# Altium PCB heart.PcbDoc (part 4 of 8)
Units mil, origin at the board's own origin, x right, y up, seen from the top; angles counter-clockwise.
Board outline 5000 x 6000 mil, 2 copper layers (Top Layer, Bottom Layer); 76 components, 43 nets, 328 pads, 50 vias.
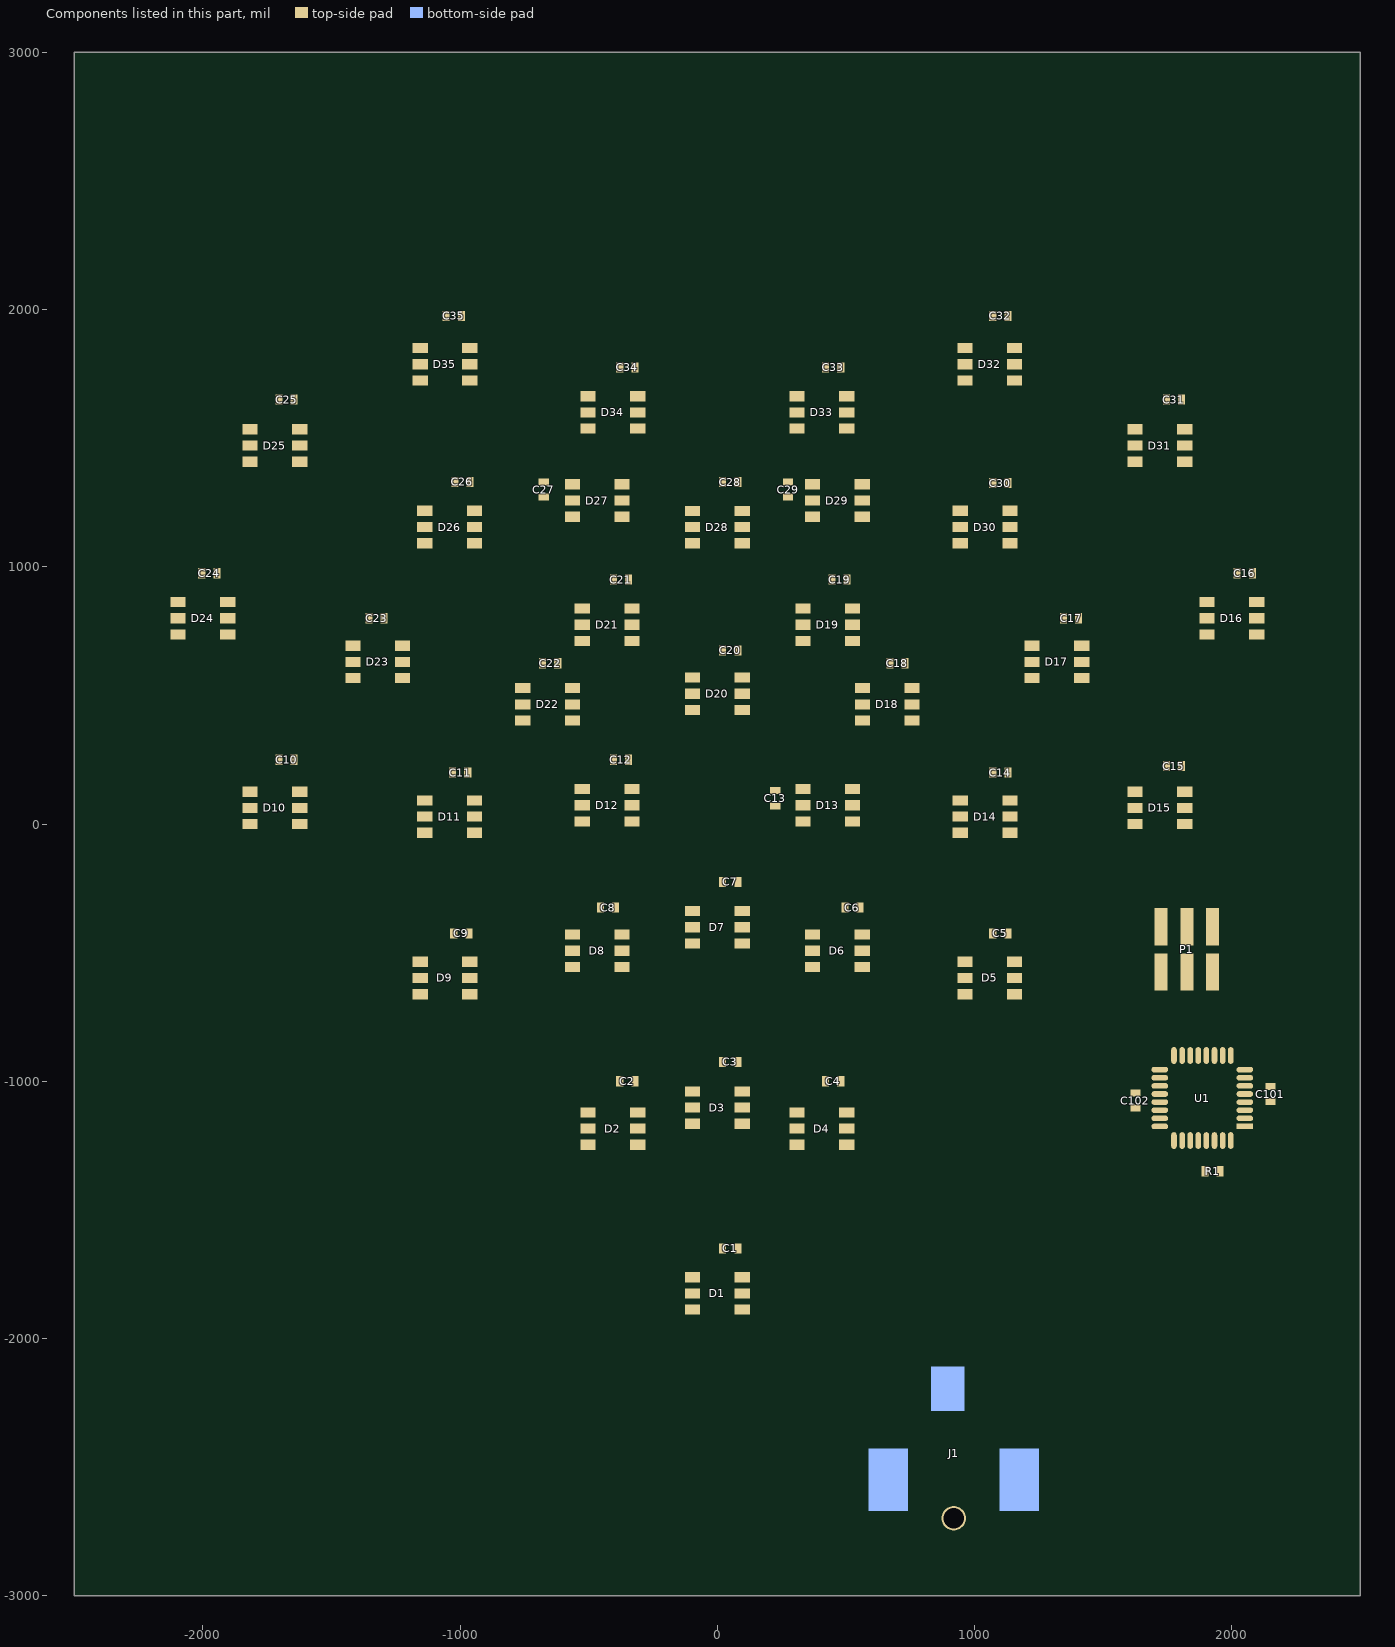
[diagram p4: the components of this part, seen from the top]

## Via types
v1: diameter 48, hole 20, Top Layer to Bottom Layer, 46 vias
v2: diameter 165, hole 150, Top Layer to Bottom Layer, 4 vias

## Nets (pads, with @x,y where several pads share a name; then routed paths per layer and width w, separated by ;. In a path a pad name is that pad's centre, name@x,y a point inside that pad or via, vN(x,y) a via of type N, cw(c..) or ccw(c..) an arc to the next point about the centre after c; other vN are vias at no path point) (continued)
copper on no net: (continued)
  Bottom Layer w2.65: -1898.12,-1480.56 -1855.64,-1480.56 ; -1898.12,-1477.91 -1852.98,-1477.91 ; -1898.12,-1419.5 -1892.81,-1419.5 ; -1898.12,-1416.84 -1892.81,-1416.84 ; -1898.12,-1414.19 -1895.46,-1414.19 ; -1898.12,-1260.2 -1884.84,-1260.2 ; -1895.46,-2221.32 -1852.98,-2221.32 ; -1895.46,-2157.6 -1882.19,-2157.6 ; -1895.46,-2154.94 -1879.53,-2154.94 ; -1895.46,-2104.49 -1871.57,-2104.49 ; -1895.46,-2101.84 -1852.98,-2101.84 ; -1895.46,-2072.63 -1775.99,-2072.63 ; -1895.46,-2048.74 -1847.67,-2048.74 ; -1895.46,-1833.68 -1850.33,-1833.68 ; -1895.46,-1785.89 -1868.91,-1785.89 ; -1895.46,-1722.17 -1040.54,-1722.17 ; -1895.46,-1589.42 -1744.13,-1589.42 ; -1895.46,-1475.25 -1852.98,-1475.25 ; -1895.46,-1390.29 -1834.4,-1390.29 ; -1895.46,-1262.85 -1884.84,-1262.85 ; -1892.81,-2152.28 -1879.53,-2152.28 ; -1892.81,-2149.63 -1879.53,-2149.63 ; -1892.81,-2109.8 -1876.88,-2109.8 ; -1892.81,-2107.15 -1874.22,-2107.15 ; -1892.81,-1836.34 -1847.67,-1836.34 ; -1892.81,-1719.52 -1037.89,-1719.52 ; -1892.81,-1592.07 -1744.13,-1592.07 ; -1892.81,-1472.6 -1850.33,-1472.6 ; -1892.81,-1268.16 -1882.19,-1268.16 ; -1892.81,-1265.51 -1882.19,-1265.51 ; -1890.15,-2146.97 -1876.88,-2146.97 ; -1890.15,-2144.32 -1876.88,-2144.32 ; -1890.15,-2141.66 -1876.88,-2141.66 ; -1890.15,-2139.01 -1876.88,-2139.01 ; -1890.15,-2120.42 -1876.88,-2120.42 ; -1890.15,-2117.77 -1876.88,-2117.77 ; -1890.15,-2115.11 -1876.88,-2115.11 ; -1890.15,-2112.46 -1876.88,-2112.46 ; -1890.15,-2075.29 -1775.99,-2075.29 ; -1890.15,-1838.99 -1845.02,-1838.99 ; -1890.15,-1788.55 -1868.91,-1788.55 ; -1890.15,-1716.86 -1035.23,-1716.86 ; -1890.15,-1714.21 -1029.92,-1714.21 ; -1890.15,-1594.73 -1746.78,-1594.73 ; -1890.15,-1493.84 -1860.95,-1493.84 ; -1890.15,-1469.94 -1850.33,-1469.94 ; -1890.15,-1392.95 -1834.4,-1392.95 ; -1890.15,-1273.47 -1879.53,-1273.47 ; -1890.15,-1270.82 -1879.53,-1270.82 ; -1887.5,-2223.97 -1845.02,-2223.97 ; -1887.5,-2136.35 -1874.22,-2136.35 ; -1887.5,-2133.7 -1874.22,-2133.7 ; -1887.5,-2131.04 -1874.22,-2131.04 ; -1887.5,-2128.39 -1874.22,-2128.39 ; -1887.5,-2125.73 -1874.22,-2125.73 ; -1887.5,-2123.08 -1874.22,-2123.08 ; -1887.5,-2077.94 -1778.64,-2077.94 ; -1887.5,-1841.65 -1842.36,-1841.65 ; -1887.5,-1791.2 -1866.26,-1791.2 ; -1887.5,-1711.55 -1021.96,-1711.55 ; -1887.5,-1597.38 -1746.78,-1597.38 ; -1887.5,-1467.29 -1850.33,-1467.29 ; -1887.5,-1395.6 -1834.4,-1395.6 ; -1884.84,-2080.6 -1778.64,-2080.6 ; -1884.84,-1844.3 -1839.71,-1844.3 ; -1884.84,-1793.86 -1863.6,-1793.86 ; -1884.84,-1708.9 -1016.65,-1708.9 ; -1884.84,-1602.69 -1749.44,-1602.69 ; -1884.84,-1600.04 -1746.78,-1600.04 ; -1884.84,-1464.63 -1847.67,-1464.63 ; -1884.84,-1461.98 -1847.67,-1461.98 ; -1884.84,-1398.26 -1834.4,-1398.26 ; -1882.19,-1849.61 -1831.74,-1849.61 ; -1882.19,-1846.96 -1834.4,-1846.96 ; -1882.19,-1706.24 -1006.03,-1706.24 ; -1882.19,-1703.59 -995.41,-1703.59 ; -1882.19,-1605.35 -1749.44,-1605.35 ; -1882.19,-1459.32 -1845.02,-1459.32 ; -1882.19,-1400.91 -1834.4,-1400.91 ; -1879.53,-2226.63 -1834.4,-2226.63 ; -1879.53,-1852.27 -1829.09,-1852.27 ; -1879.53,-1796.51 -1860.95,-1796.51 ; -1879.53,-1700.93 -982.13,-1700.93 ; -1879.53,-1610.66 -1749.44,-1610.66 ; -1879.53,-1608 -1749.44,-1608 ; -1879.53,-1496.49 -1860.95,-1496.49 ; -1879.53,-1456.67 -1845.02,-1456.67 ; -1879.53,-1403.57 -1834.4,-1403.57 ; -1876.88,-2229.28 -1823.78,-2229.28 ; -1876.88,-2091.22 -1868.91,-2091.22 ; -1876.88,-1854.92 -1826.43,-1854.92 ; -1876.88,-1799.17 -1860.95,-1799.17 ; -1876.88,-1698.28 -963.55,-1698.28 ; -1876.88,-1695.62 -942.31,-1695.62 ; -1876.88,-1692.97 -921.07,-1692.97 ; -1876.88,-1615.97 -1749.44,-1615.97 ; -1876.88,-1613.31 -1749.44,-1613.31 ; -1876.88,-1454.01 -1842.36,-1454.01 ; -1876.88,-1451.36 -1842.36,-1451.36 ; -1876.88,-1408.88 -1831.74,-1408.88 ; -1876.88,-1406.22 -1831.74,-1406.22 ; -1876.88,-1284.09 -1868.91,-1284.09 ; -1876.88,-1254.89 -1834.4,-1254.89 ; -1874.22,-1857.58 -1823.78,-1857.58 ; -1874.22,-1801.82 -1858.29,-1801.82 ; -1874.22,-1690.31 -902.48,-1690.31 ; -1874.22,-1687.66 -881.24,-1687.66 ; -1874.22,-1621.28 -1749.44,-1621.28 ; -1874.22,-1618.62 -1749.44,-1618.62 ; -1874.22,-1448.7 -1839.71,-1448.7 ; -1874.22,-1446.05 -1839.71,-1446.05 ; -1874.22,-1443.39 -1839.71,-1443.39 ; -1874.22,-1414.19 -1834.4,-1414.19 ; -1874.22,-1411.53 -1831.74,-1411.53 ; -1874.22,-1281.44 -1868.91,-1281.44 ; -1874.22,-1257.54 -1837.05,-1257.54 ; -1871.57,-2231.94 -1770.68,-2231.94 ; -1871.57,-1860.23 -1821.12,-1860.23 ; -1871.57,-1685 -1475.97,-1685 ; -1871.57,-1682.35 -1489.24,-1682.35 ; -1871.57,-1679.69 -1494.55,-1679.69 ; -1871.57,-1629.24 -1746.78,-1629.24 ; -1871.57,-1626.59 -1746.78,-1626.59 ; -1871.57,-1623.93 -1749.44,-1623.93 ; -1871.57,-1499.15 -1863.6,-1499.15 ; -1871.57,-1440.74 -1837.05,-1440.74 ; -1871.57,-1438.08 -1837.05,-1438.08 ; -1871.57,-1435.43 -1837.05,-1435.43 ; -1871.57,-1432.77 -1837.05,-1432.77 ; -1871.57,-1430.12 -1834.4,-1430.12 ; -1871.57,-1427.46 -1834.4,-1427.46 ; -1871.57,-1424.81 -1834.4,-1424.81 ; -1871.57,-1422.15 -1834.4,-1422.15 ; -1871.57,-1419.5 -1834.4,-1419.5 ; -1871.57,-1416.84 -1834.4,-1416.84 ; -1871.57,-1278.78 -1868.91,-1278.78 ; -1871.57,-1276.13 -1868.91,-1276.13 ; -1868.91,-2234.59 -1860.95,-2234.59 ; -1868.91,-1923.95 -1632.62,-1923.95 ; -1868.91,-1865.54 -1813.16,-1865.54 ; -1868.91,-1862.89 -1815.81,-1862.89 ; -1868.91,-1804.48 -1855.64,-1804.48 ; -1868.91,-1677.04 -1499.86,-1677.04 ; -1868.91,-1674.38 -1505.17,-1674.38 ; -1868.91,-1671.73 -1507.83,-1671.73 ; -1868.91,-1669.07 -1510.48,-1669.07 ; -1868.91,-1666.42 -1513.14,-1666.42 ; -1868.91,-1663.76 -1513.14,-1663.76 ; -1868.91,-1645.18 -1738.82,-1645.18 ; -1868.91,-1642.52 -1741.47,-1642.52 ; -1868.91,-1639.86 -1741.47,-1639.86 ; -1868.91,-1637.21 -1744.13,-1637.21 ; -1868.91,-1634.55 -1744.13,-1634.55 ; -1868.91,-1631.9 -1746.78,-1631.9 ; -1868.91,-1544.28 -1863.6,-1544.28 ; -1868.91,-1260.2 -1837.05,-1260.2 ; -1866.26,-2277.07 -1714.92,-2277.07 ; -1866.26,-2239.9 -1858.29,-2239.9 ; -1866.26,-2237.25 -1858.29,-2237.25 ; -1866.26,-2125.73 -1855.64,-2125.73 ; -1866.26,-2123.08 -1855.64,-2123.08 ; -1866.26,-2120.42 -1858.29,-2120.42 ; -1866.26,-2117.77 -1858.29,-2117.77 ; -1866.26,-2115.11 -1860.95,-2115.11 ; -1866.26,-2112.46 -1863.6,-2112.46 ; -1866.26,-2022.19 -1818.47,-2022.19 ; -1866.26,-1868.2 -1810.5,-1868.2 ; -1866.26,-1807.13 -1855.64,-1807.13 ; -1866.26,-1748.72 -1470.66,-1748.72 ; -1866.26,-1661.11 -1714.92,-1661.11 ; -1866.26,-1658.45 -1720.23,-1658.45 ; -1866.26,-1655.8 -1725.54,-1655.8 ; -1866.26,-1653.14 -1730.85,-1653.14 ; -1866.26,-1650.49 -1733.51,-1650.49 ; -1866.26,-1647.83 -1736.16,-1647.83 ; -1866.26,-1262.85 -1837.05,-1262.85 ; -1863.6,-2242.56 -1858.29,-2242.56 ; -1863.6,-1873.51 -1805.19,-1873.51 ; -1863.6,-1870.85 -1807.85,-1870.85 ; -1863.6,-1809.79 -1852.98,-1809.79 ; -1863.6,-1268.16 -1839.71,-1268.16 ; -1863.6,-1265.51 -1837.05,-1265.51 ; -1860.95,-2245.21 -1855.64,-2245.21 ; -1860.95,-2083.25 -1778.64,-2083.25 ; -1860.95,-1921.3 -1648.55,-1921.3 ; -1860.95,-1878.82 -1799.88,-1878.82 ; -1860.95,-1876.16 -1802.54,-1876.16 ; -1860.95,-1281.44 -1839.71,-1281.44 ; -1860.95,-1278.78 -1839.71,-1278.78 ; -1860.95,-1276.13 -1839.71,-1276.13 ; -1860.95,-1273.47 -1839.71,-1273.47 ; -1860.95,-1270.82 -1839.71,-1270.82 ; -1858.29,-2250.52 -1855.64,-2250.52 ; -1858.29,-2247.87 -1855.64,-2247.87 ; -1858.29,-2104.49 -1850.33,-2104.49 ; -1858.29,-1918.64 -1656.51,-1918.64 ; -1858.29,-1884.13 -1794.57,-1884.13 ; -1858.29,-1881.47 -1797.23,-1881.47 ; -1858.29,-1812.44 -1850.33,-1812.44 ; -1858.29,-1751.38 -1470.66,-1751.38 ; -1858.29,-1284.09 -1839.71,-1284.09 ; -1855.64,-2274.42 -1712.27,-2274.42 ; -1855.64,-2234.59 -1775.99,-2234.59 ; -1855.64,-2107.15 -1850.33,-2107.15 ; -1855.64,-2085.91 -1778.64,-2085.91 ; -1855.64,-1915.99 -1760.06,-1915.99 ; -1855.64,-1913.33 -1762.71,-1913.33 ; -1855.64,-1889.44 -1789.26,-1889.44 ; -1855.64,-1886.78 -1791.92,-1886.78 ; -1855.64,-1815.1 -1847.67,-1815.1 ; -1852.98,-2271.76 -1693.68,-2271.76 ; -1852.98,-2109.8 -1850.33,-2109.8 ; -1852.98,-2088.56 -1778.64,-2088.56 ; -1852.98,-2019.53 -1815.81,-2019.53 ; -1852.98,-1947.85 -1760.06,-1947.85 ; -1852.98,-1910.68 -1768.02,-1910.68 ; -1852.98,-1908.02 -1770.68,-1908.02 ; -1852.98,-1905.37 -1773.33,-1905.37 ; -1852.98,-1902.71 -1775.99,-1902.71 ; -1852.98,-1900.06 -1778.64,-1900.06 ; -1852.98,-1897.4 -1781.3,-1897.4 ; -1852.98,-1894.75 -1783.95,-1894.75 ; -1852.98,-1892.09 -1786.61,-1892.09 ; -1852.98,-1817.75 -1847.67,-1817.75 ; -1852.98,-1754.03 -1473.31,-1754.03 ; -1850.33,-2269.11 -1693.68,-2269.11 ; -1850.33,-2091.22 -1778.64,-2091.22 ; -1850.33,-2064.67 -1773.33,-2064.67 ; -1850.33,-1820.41 -1845.02,-1820.41 ; -1850.33,-1756.69 -1475.97,-1756.69 ; -1847.67,-2266.45 -1691.03,-2266.45 ; -1847.67,-2263.8 -1691.03,-2263.8 ; -1847.67,-2237.25 -1778.64,-2237.25 ; -1847.67,-2093.87 -1778.64,-2093.87 ; -1847.67,-2016.88 -1815.81,-2016.88 ; -1847.67,-1823.06 -1842.36,-1823.06 ; -1847.67,-1759.34 -1669.79,-1759.34 ; -1845.02,-2261.14 -1691.03,-2261.14 ; -1845.02,-2258.49 -1693.68,-2258.49 ; -1845.02,-2255.83 -1693.68,-2255.83 ; -1845.02,-2253.18 -1693.68,-2253.18 ; -1845.02,-2250.52 -1831.74,-2250.52 ; -1845.02,-2247.87 -1842.36,-2247.87 ; -1845.02,-2099.18 -1778.64,-2099.18 ; -1845.02,-2096.53 -1778.64,-2096.53 ; -1845.02,-2014.22 -1815.81,-2014.22 ; -1845.02,-1762 -1675.1,-1762 ; -1842.36,-2125.73 -1770.68,-2125.73 ; -1842.36,-2123.08 -1773.33,-2123.08 ; -1842.36,-2109.8 -1775.99,-2109.8 ; -1842.36,-2107.15 -1778.64,-2107.15 ; -1842.36,-2104.49 -1778.64,-2104.49 ; -1842.36,-2101.84 -1778.64,-2101.84 ; -1842.36,-1950.5 -1765.37,-1950.5 ; -1842.36,-1825.72 -1839.71,-1825.72 ; -1842.36,-1764.65 -1677.75,-1764.65 ; -1839.71,-2120.42 -1773.33,-2120.42 ; -1839.71,-2117.77 -1773.33,-2117.77 ; -1839.71,-2115.11 -1775.99,-2115.11 ; -1839.71,-2112.46 -1775.99,-2112.46 ; -1839.71,-2062.01 -1773.33,-2062.01 ; -1839.71,-2011.57 -1815.81,-2011.57 ; -1839.71,-1767.31 -1680.41,-1767.31 ; -1837.05,-2239.9 -1786.61,-2239.9 ; -1837.05,-2008.91 -1815.81,-2008.91 ; -1837.05,-2006.26 -1813.16,-2006.26 ; -1834.4,-2178.84 -1831.74,-2178.84 ; -1834.4,-2176.18 -1829.09,-2176.18 ; -1834.4,-2173.53 -1826.43,-2173.53 ; -1834.4,-2059.36 -1770.68,-2059.36 ; -1834.4,-2003.6 -1813.16,-2003.6 ; -1834.4,-1953.16 -1770.68,-1953.16 ; -1834.4,-1769.96 -1706.96,-1769.96 ; -1831.74,-2170.87 -1823.78,-2170.87 ; -1831.74,-2168.22 -1818.47,-2168.22 ; -1831.74,-2000.95 -1815.81,-2000.95 ; -1831.74,-1998.29 -1815.81,-1998.29 ; -1831.74,-1995.64 -1815.81,-1995.64 ; -1831.74,-1971.74 -1826.43,-1971.74 ; -1831.74,-1791.2 -1829.09,-1791.2 ; -1831.74,-1772.62 -1709.61,-1772.62 ; -1831.74,-1525.7 -1752.09,-1525.7 ; -1831.74,-1523.04 -1749.44,-1523.04 ; -1831.74,-1286.75 -1818.47,-1286.75 ; -1829.09,-2165.56 -1815.81,-2165.56 ; -1829.09,-2162.91 -1807.85,-2162.91 ; -1829.09,-2056.7 -1770.68,-2056.7 ; -1829.09,-1992.98 -1815.81,-1992.98 ; -1829.09,-1990.33 -1815.81,-1990.33 ; -1829.09,-1987.67 -1818.47,-1987.67 ; -1829.09,-1985.02 -1818.47,-1985.02 ; -1829.09,-1982.36 -1821.12,-1982.36 ; -1829.09,-1979.71 -1821.12,-1979.71 ; -1829.09,-1977.05 -1823.78,-1977.05 ; -1829.09,-1974.4 -1826.43,-1974.4 ; -1829.09,-1955.81 -1773.33,-1955.81 ; -1829.09,-1793.86 -1826.43,-1793.86 ; -1829.09,-1775.27 -1709.61,-1775.27 ; -1829.09,-1536.32 -1765.37,-1536.32 ; -1829.09,-1533.66 -1762.71,-1533.66 ; -1829.09,-1531.01 -1757.4,-1531.01 ; -1829.09,-1528.35 -1754.75,-1528.35 ; -1829.09,-1520.39 -1746.78,-1520.39 ; -1829.09,-1517.73 -1744.13,-1517.73 ; -1829.09,-1515.08 -1741.47,-1515.08 ; -1829.09,-1512.42 -1738.82,-1512.42 ; -1829.09,-1509.77 -1736.16,-1509.77 ; -1829.09,-1297.37 -1815.81,-1297.37 ; -1829.09,-1294.71 -1815.81,-1294.71 ; -1829.09,-1292.06 -1815.81,-1292.06 ; -1829.09,-1289.4 -1815.81,-1289.4 ; -1829.09,-1284.09 -1818.47,-1284.09 ; -1829.09,-1281.44 -1815.81,-1281.44 ; -1829.09,-1278.78 -1815.81,-1278.78 ; -1829.09,-1276.13 -1815.81,-1276.13 ; -1829.09,-1273.47 -1815.81,-1273.47 ; -1829.09,-1270.82 -1815.81,-1270.82 ; -1829.09,-1268.16 -1815.81,-1268.16 ; -1829.09,-1265.51 -1815.81,-1265.51 ; -1829.09,-1262.85 -1813.16,-1262.85 ; -1826.43,-2160.25 -1765.37,-2160.25 ; -1826.43,-2054.05 -1768.02,-2054.05 ; -1826.43,-1958.47 -1775.99,-1958.47 ; -1826.43,-1799.17 -1821.12,-1799.17 ; -1826.43,-1796.51 -1823.78,-1796.51 ; -1826.43,-1777.93 -1712.27,-1777.93 ; -1826.43,-1541.63 -1773.33,-1541.63 ; -1826.43,-1538.97 -1770.68,-1538.97 ; -1826.43,-1507.11 -1733.51,-1507.11 ; -1826.43,-1504.46 -1730.85,-1504.46 ; -1826.43,-1501.8 -1728.2,-1501.8 ; -1826.43,-1305.33 -1810.5,-1305.33 ; -1826.43,-1302.68 -1813.16,-1302.68 ; -1826.43,-1300.02 -1813.16,-1300.02 ; -1826.43,-1260.2 -1813.16,-1260.2 ; -1826.43,-1257.54 -1810.5,-1257.54 ; -1826.43,-1254.89 -1810.5,-1254.89 ; -1823.78,-2242.56 -1797.23,-2242.56 ; -1823.78,-2157.6 -1768.02,-2157.6 ; -1823.78,-2051.39 -1765.37,-2051.39 ; -1823.78,-1801.82 -1815.81,-1801.82 ; -1823.78,-1780.58 -1709.61,-1780.58 ; -1823.78,-1544.28 -1778.64,-1544.28 ; -1823.78,-1499.15 -1725.54,-1499.15 ; -1823.78,-1496.49 -1722.89,-1496.49 ; -1823.78,-1310.64 -1807.85,-1310.64 ; -1823.78,-1307.99 -1810.5,-1307.99 ; -1823.78,-1252.23 -1807.85,-1252.23 ; -1821.12,-2048.74 -1765.37,-2048.74 ; -1821.12,-1961.12 -1778.64,-1961.12 ; -1821.12,-1804.48 -1813.16,-1804.48 ; -1821.12,-1783.24 -1709.61,-1783.24 ; -1821.12,-1493.84 -1720.23,-1493.84 ; -1821.12,-1491.18 -1714.92,-1491.18 ; -1821.12,-1315.95 -1805.19,-1315.95 ; -1821.12,-1313.3 -1807.85,-1313.3 ; -1821.12,-1249.58 -1807.85,-1249.58 ; -1821.12,-1246.92 -1805.19,-1246.92 ; -1818.47,-2154.94 -1770.68,-2154.94 ; -1818.47,-2046.08 -1765.37,-2046.08 ; -1818.47,-1966.43 -1781.3,-1966.43 ; -1818.47,-1963.78 -1778.64,-1963.78 ; -1818.47,-1807.13 -1810.5,-1807.13 ; -1818.47,-1785.89 -1706.96,-1785.89 ; -1818.47,-1546.94 -1783.95,-1546.94 ; -1818.47,-1488.53 -1712.27,-1488.53 ; -1818.47,-1485.87 -1709.61,-1485.87 ; -1818.47,-1483.22 -1704.3,-1483.22 ; -1818.47,-1321.26 -1799.88,-1321.26 ; -1818.47,-1318.61 -1802.54,-1318.61 ; -1818.47,-1244.27 -1802.54,-1244.27 ; -1818.47,-1241.61 -1799.88,-1241.61 ; -1818.47,-1215.06 -1810.5,-1215.06 ; -1818.47,-1212.41 -1813.16,-1212.41 ; -1815.81,-2043.43 -1768.02,-2043.43 ; -1815.81,-1969.09 -1783.95,-1969.09 ; -1815.81,-1809.79 -1807.85,-1809.79 ; -1815.81,-1788.55 -1706.96,-1788.55 ; -1815.81,-1480.56 -1736.16,-1480.56 ; -1815.81,-1477.91 -1746.78,-1477.91 ; -1815.81,-1323.92 -1797.23,-1323.92 ; -1815.81,-1238.96 -1794.57,-1238.96 ; -1815.81,-1230.99 -1781.3,-1230.99 ; -1815.81,-1228.34 -1770.68,-1228.34 ; -1815.81,-1225.68 -1741.47,-1225.68 ; -1815.81,-1223.03 -1802.54,-1223.03 ; -1815.81,-1220.37 -1805.19,-1220.37 ; -1815.81,-1217.72 -1807.85,-1217.72 ; -1815.81,-1201.79 -1359.15,-1201.79 ; -1813.16,-2152.28 -1775.99,-2152.28 ; -1813.16,-2040.77 -1770.68,-2040.77 ; -1813.16,-1971.74 -1783.95,-1971.74 ; -1813.16,-1812.44 -1802.54,-1812.44 ; -1813.16,-1791.2 -1704.3,-1791.2 ; -1813.16,-1549.59 -1791.92,-1549.59 ; -1813.16,-1475.25 -1752.09,-1475.25 ; -1813.16,-1472.6 -1754.75,-1472.6 ; -1813.16,-1326.57 -1791.92,-1326.57 ; -1813.16,-1236.3 -1791.92,-1236.3 ; -1810.5,-2038.12 -1773.33,-2038.12 ; -1810.5,-2035.46 -1775.99,-2035.46 ; -1810.5,-1977.05 -1786.61,-1977.05 ; -1810.5,-1974.4 -1786.61,-1974.4 ; -1810.5,-1817.75 -1797.23,-1817.75 ; -1810.5,-1815.1 -1799.88,-1815.1 ; -1810.5,-1469.94 -1757.4,-1469.94 ; -1810.5,-1467.29 -1760.06,-1467.29 ; -1810.5,-1329.23 -1789.26,-1329.23 ; -1810.5,-1233.65 -1786.61,-1233.65 ; -1807.85,-2149.63 -1783.95,-2149.63 ; -1807.85,-2032.81 -1778.64,-2032.81 ; -1807.85,-2030.15 -1781.3,-2030.15 ; -1807.85,-1979.71 -1789.26,-1979.71 ; -1807.85,-1820.41 -1794.57,-1820.41 ; -1807.85,-1793.86 -1701.65,-1793.86 ; -1807.85,-1464.63 -1760.06,-1464.63 ; -1807.85,-1461.98 -1762.71,-1461.98 ; -1807.85,-1459.32 -1765.37,-1459.32 ; -1807.85,-1331.88 -1783.95,-1331.88 ; -1807.85,-1284.09 -1688.37,-1284.09 ; -1807.85,-1281.44 -1685.72,-1281.44 ; -1807.85,-1278.78 -1685.72,-1278.78 ; -1807.85,-1276.13 -1685.72,-1276.13 ; -1807.85,-1273.47 -1683.06,-1273.47 ; -1807.85,-1270.82 -1683.06,-1270.82 ; -1807.85,-1204.44 -1361.8,-1204.44 ; -1805.19,-2027.5 -1781.3,-2027.5 ; -1805.19,-2024.84 -1783.95,-2024.84 ; -1805.19,-2022.19 -1783.95,-2022.19 ; -1805.19,-1990.33 -1789.26,-1990.33 ; -1805.19,-1987.67 -1789.26,-1987.67 ; -1805.19,-1985.02 -1789.26,-1985.02 ; -1805.19,-1982.36 -1789.26,-1982.36 ; -1805.19,-1823.06 -1791.92,-1823.06 ; -1805.19,-1796.51 -1701.65,-1796.51 ; -1805.19,-1456.67 -1765.37,-1456.67 ; -1805.19,-1454.01 -1768.02,-1454.01 ; -1805.19,-1451.36 -1768.02,-1451.36 ; -1805.19,-1334.54 -1778.64,-1334.54 ; -1805.19,-1268.16 -1680.41,-1268.16 ; -1805.19,-1265.51 -1680.41,-1265.51 ; -1805.19,-1262.85 -1675.1,-1262.85 ; -1805.19,-1207.1 -1367.11,-1207.1 ; -1802.54,-2019.53 -1786.61,-2019.53 ; -1802.54,-2016.88 -1786.61,-2016.88 ; -1802.54,-2014.22 -1786.61,-2014.22 ; -1802.54,-2011.57 -1789.26,-2011.57 ; -1802.54,-2008.91 -1789.26,-2008.91 ; -1802.54,-2006.26 -1789.26,-2006.26 ; -1802.54,-2003.6 -1789.26,-2003.6 ; -1802.54,-2000.95 -1789.26,-2000.95 ; -1802.54,-1998.29 -1789.26,-1998.29 ; -1802.54,-1995.64 -1789.26,-1995.64 ; -1802.54,-1992.98 -1789.26,-1992.98 ; -1802.54,-1825.72 -1786.61,-1825.72 ; -1802.54,-1799.17 -1698.99,-1799.17 ; -1802.54,-1586.76 -1741.47,-1586.76 ; -1802.54,-1448.7 -1770.68,-1448.7 ; -1802.54,-1446.05 -1770.68,-1446.05 ; -1802.54,-1443.39 -1773.33,-1443.39 ; -1802.54,-1440.74 -1773.33,-1440.74 ; -1802.54,-1260.2 -1672.44,-1260.2 ; -1802.54,-1257.54 -1664.48,-1257.54 ; -1802.54,-1209.75 -1781.3,-1209.75 ; -1799.88,-1828.37 -1783.95,-1828.37 ; -1799.88,-1801.82 -1696.34,-1801.82 ; -1799.88,-1438.08 -1773.33,-1438.08 ; -1799.88,-1435.43 -1775.99,-1435.43 ; -1799.88,-1432.77 -1778.64,-1432.77 ; -1799.88,-1430.12 -1778.64,-1430.12 ; -1799.88,-1427.46 -1783.95,-1427.46 ; -1799.88,-1395.6 -1667.13,-1395.6 ; -1799.88,-1392.95 -1667.13,-1392.95 ; -1799.88,-1390.29 -1669.79,-1390.29 ; -1799.88,-1387.64 -1669.79,-1387.64 ; -1799.88,-1337.19 -1754.75,-1337.19 ; -1799.88,-1254.89 -1566.24,-1254.89 ; -1799.88,-1212.41 -1791.92,-1212.41 ; -1797.23,-2229.28 -1768.02,-2229.28 ; -1797.23,-1833.68 -1778.64,-1833.68 ; -1797.23,-1831.03 -1781.3,-1831.03 ; -1797.23,-1804.48 -1696.34,-1804.48 ; -1797.23,-1424.81 -1789.26,-1424.81 ; -1797.23,-1398.26 -1667.13,-1398.26 ; -1797.23,-1339.85 -1706.96,-1339.85 ; -1797.23,-1252.23 -1560.93,-1252.23 ; -1794.57,-1836.34 -1773.33,-1836.34 ; -1794.57,-1249.58 -1558.27,-1249.58 ; -1791.92,-1838.99 -1770.68,-1838.99 ; -1791.92,-1807.13 -1693.68,-1807.13 ; -1791.92,-1342.5 -1709.61,-1342.5 ; -1791.92,-1246.92 -1555.62,-1246.92 ; -1791.92,-1223.03 -1746.78,-1223.03 ; -1789.26,-2250.52 -1693.68,-2250.52 ; -1789.26,-1841.65 -1768.02,-1841.65 ; -1789.26,-1809.79 -1691.03,-1809.79 ; -1786.61,-2226.63 -1765.37,-2226.63 ; -1786.61,-2162.91 -1762.71,-2162.91 ; -1786.61,-1844.3 -1765.37,-1844.3 ; -1786.61,-1812.44 -1688.37,-1812.44 ; -1786.61,-1400.91 -1667.13,-1400.91 ; -1786.61,-1345.16 -1709.61,-1345.16 ; -1786.61,-1244.27 -1730.85,-1244.27 ; -1786.61,-1220.37 -1752.09,-1220.37 ; -1783.95,-1846.96 -1760.06,-1846.96 ; -1783.95,-1815.1 -1685.72,-1815.1 ; -1781.3,-2247.87 -1696.34,-2247.87 ; -1781.3,-2223.97 -1762.71,-2223.97 ; -1781.3,-2165.56 -1760.06,-2165.56 ; -1781.3,-1852.27 -1754.75,-1852.27 ; -1781.3,-1849.61 -1757.4,-1849.61 ; -1781.3,-1817.75 -1685.72,-1817.75 ; -1781.3,-1584.11 -1741.47,-1584.11 ; -1781.3,-1241.61 -1738.82,-1241.61 ; -1778.64,-2221.32 -1760.06,-2221.32 ; -1778.64,-1854.92 -1752.09,-1854.92 ; -1778.64,-1403.57 -1664.48,-1403.57 ; -1778.64,-1347.81 -1706.96,-1347.81 ; -1775.99,-2245.21 -1696.34,-2245.21 ; -1775.99,-2218.66 -1757.4,-2218.66 ; -1775.99,-2168.22 -1757.4,-2168.22 ; -1775.99,-1857.58 -1746.78,-1857.58 ; -1775.99,-1820.41 -1683.06,-1820.41 ; -1775.99,-1238.96 -1746.78,-1238.96 ; -1773.33,-2216.01 -1757.4,-2216.01 ; -1773.33,-2170.87 -1757.4,-2170.87 ; -1773.33,-1860.23 -1744.13,-1860.23 ; -1773.33,-1823.06 -1680.41,-1823.06 ; -1773.33,-1581.45 -1738.82,-1581.45 ; -1773.33,-1406.22 -1661.82,-1406.22 ; -1770.68,-2242.56 -1698.99,-2242.56 ; -1770.68,-2213.35 -1754.75,-2213.35 ; -1770.68,-2173.53 -1754.75,-2173.53 ; -1770.68,-1865.54 -1736.16,-1865.54 ; -1770.68,-1862.89 -1741.47,-1862.89 ; -1770.68,-1825.72 -1677.75,-1825.72 ; -1770.68,-1408.88 -1661.82,-1408.88 ; -1770.68,-1334.54 -1754.75,-1334.54 ; -1768.02,-2210.7 -1754.75,-2210.7 ; -1768.02,-2208.04 -1752.09,-2208.04 ; -1768.02,-2178.84 -1752.09,-2178.84 ; -1768.02,-2176.18 -1754.75,-2176.18 ; -1768.02,-1998.29 -1744.13,-1998.29 ; -1768.02,-1995.64 -1744.13,-1995.64 ; -1768.02,-1992.98 -1746.78,-1992.98 ; -1768.02,-1990.33 -1746.78,-1990.33 ; -1768.02,-1987.67 -1746.78,-1987.67 ; -1768.02,-1985.02 -1746.78,-1985.02 ; -1768.02,-1868.2 -1733.51,-1868.2 ; -1768.02,-1828.37 -1675.1,-1828.37 ; -1768.02,-1578.8 -1736.16,-1578.8 ; -1768.02,-1411.53 -1659.17,-1411.53 ; -1768.02,-1350.47 -1738.82,-1350.47 ; -1768.02,-1331.88 -1754.75,-1331.88 ; -1768.02,-1329.23 -1754.75,-1329.23 ; -1765.37,-2239.9 -1698.99,-2239.9 ; -1765.37,-2205.39 -1752.09,-2205.39 ; -1765.37,-2202.73 -1728.2,-2202.73 ; -1765.37,-2200.08 -1728.2,-2200.08 ; -1765.37,-2197.42 -1730.85,-2197.42 ; -1765.37,-2189.46 -1746.78,-2189.46 ; -1765.37,-2186.8 -1749.44,-2186.8 ; -1765.37,-2184.15 -1752.09,-2184.15 ; -1765.37,-2181.49 -1752.09,-2181.49 ; -1765.37,-2006.26 -1736.16,-2006.26 ; -1765.37,-2003.6 -1738.82,-2003.6 ; -1765.37,-2000.95 -1741.47,-2000.95 ; -1765.37,-1982.36 -1749.44,-1982.36 ; -1765.37,-1979.71 -1749.44,-1979.71 ; -1765.37,-1870.85 -1730.85,-1870.85 ; -1765.37,-1831.03 -1675.1,-1831.03 ; -1765.37,-1414.19 -1656.51,-1414.19 ; -1765.37,-1326.57 -1754.75,-1326.57 ; -1762.71,-2237.25 -1701.65,-2237.25 ; -1762.71,-2194.77 -1736.16,-2194.77 ; -1762.71,-2192.11 -1741.47,-2192.11 ; -1762.71,-2008.91 -1730.85,-2008.91 ; -1762.71,-1977.05 -1746.78,-1977.05 ; -1762.71,-1974.4 -1746.78,-1974.4 ; -1762.71,-1873.51 -1725.54,-1873.51 ; -1762.71,-1576.14 -1733.51,-1576.14 ; -1762.71,-1419.5 -1651.2,-1419.5 ; -1762.71,-1416.84 -1653.86,-1416.84 ; -1762.71,-1323.92 -1754.75,-1323.92 ; -1762.71,-1321.26 -1754.75,-1321.26 ; -1762.71,-1318.61 -1754.75,-1318.61 ; -1762.71,-1315.95 -1757.4,-1315.95 ; -1762.71,-1313.3 -1757.4,-1313.3 ; -1762.71,-1310.64 -1760.06,-1310.64 ; -1762.71,-1307.99 -1760.06,-1307.99 ; -1760.06,-2234.59 -1738.82,-2234.59 ; -1760.06,-2014.22 -1648.55,-2014.22 ; -1760.06,-2011.57 -1725.54,-2011.57 ; -1760.06,-1971.74 -1746.78,-1971.74 ; -1760.06,-1878.82 -1720.23,-1878.82 ; -1760.06,-1876.16 -1722.89,-1876.16 ; -1760.06,-1833.68 -1672.44,-1833.68 ; -1760.06,-1422.15 -1648.55,-1422.15 ; -1757.4,-2231.94 -1741.47,-2231.94 ; -1757.4,-2016.88 -1645.89,-2016.88 ; -1757.4,-1969.09 -1746.78,-1969.09 ; -1757.4,-1881.47 -1717.58,-1881.47 ; -1757.4,-1836.34 -1669.79,-1836.34 ; -1757.4,-1573.49 -1730.85,-1573.49 ; -1757.4,-1427.46 -1637.93,-1427.46 ; -1757.4,-1424.81 -1643.24,-1424.81 ; -1757.4,-1209.75 -1369.77,-1209.75 ; -1754.75,-2019.53 -1645.89,-2019.53 ; -1754.75,-1966.43 -1744.13,-1966.43 ; -1754.75,-1884.13 -1712.27,-1884.13 ; -1754.75,-1838.99 -1667.13,-1838.99 ; -1754.75,-1435.43 -1736.16,-1435.43 ; -1754.75,-1432.77 -1733.51,-1432.77 ; -1754.75,-1430.12 -1730.85,-1430.12 ; -1752.09,-1963.78 -1741.47,-1963.78 ; -1752.09,-1915.99 -1661.82,-1915.99 ; -1752.09,-1889.44 -1706.96,-1889.44 ; -1752.09,-1886.78 -1709.61,-1886.78 ; -1752.09,-1841.65 -1664.48,-1841.65 ; -1752.09,-1570.83 -1725.54,-1570.83 ; -1752.09,-1443.39 -1738.82,-1443.39 ; -1752.09,-1440.74 -1738.82,-1440.74 ; -1752.09,-1438.08 -1738.82,-1438.08 ; -1752.09,-1228.34 -1736.16,-1228.34 ; -1749.44,-2022.19 -1722.89,-2022.19 ; -1749.44,-1913.33 -1667.13,-1913.33 ; -1749.44,-1892.09 -1701.65,-1892.09 ; -1749.44,-1568.18 -1720.23,-1568.18 ; -1749.44,-1451.36 -1738.82,-1451.36 ; -1749.44,-1448.7 -1738.82,-1448.7 ; -1749.44,-1446.05 -1738.82,-1446.05 ; -1746.78,-2101.84 -1714.92,-2101.84 ; -1746.78,-2099.18 -1714.92,-2099.18 ; -1746.78,-2096.53 -1714.92,-2096.53 ; -1746.78,-2093.87 -1717.58,-2093.87 ; -1746.78,-2091.22 -1717.58,-2091.22 ; -1746.78,-2088.56 -1720.23,-2088.56 ; -1746.78,-2085.91 -1720.23,-2085.91 ; -1746.78,-2083.25 -1722.89,-2083.25 ; -1746.78,-2080.6 -1722.89,-2080.6 ; -1746.78,-2077.94 -1725.54,-2077.94 ; -1746.78,-2024.84 -1730.85,-2024.84 ; -1746.78,-1961.12 -1741.47,-1961.12 ; -1746.78,-1910.68 -1672.44,-1910.68 ; -1746.78,-1897.4 -1693.68,-1897.4 ; -1746.78,-1894.75 -1698.99,-1894.75 ; -1746.78,-1844.3 -1661.82,-1844.3 ; -1746.78,-1456.67 -1733.51,-1456.67 ; -1746.78,-1454.01 -1736.16,-1454.01 ; -1746.78,-1212.41 -1555.62,-1212.41 ; -1744.13,-2107.15 -1714.92,-2107.15 ; -1744.13,-2104.49 -1714.92,-2104.49 ; -1744.13,-2075.29 -1728.2,-2075.29 ; -1744.13,-2072.63 -1733.51,-2072.63 ; -1744.13,-2069.98 -1736.16,-2069.98 ; -1744.13,-1908.02 -1677.75,-1908.02 ; -1744.13,-1905.37 -1683.06,-1905.37 ; -1744.13,-1902.71 -1685.72,-1902.71 ; -1744.13,-1900.06 -1691.03,-1900.06 ; -1744.13,-1846.96 -1661.82,-1846.96 ; -1744.13,-1565.52 -1714.92,-1565.52 ; -1744.13,-1459.32 -1730.85,-1459.32 ; -1741.47,-2112.46 -1714.92,-2112.46 ; -1741.47,-2109.8 -1714.92,-2109.8 ; -1741.47,-2067.32 -1738.82,-2067.32 ; -1741.47,-2027.5 -1738.82,-2027.5 ; -1741.47,-1849.61 -1659.17,-1849.61 ; -1741.47,-1562.87 -1595.45,-1562.87 ; -1741.47,-1461.98 -1720.23,-1461.98 ; -1741.47,-1230.99 -1733.51,-1230.99 ; -1741.47,-1215.06 -1560.93,-1215.06 ; -1738.82,-2115.11 -1714.92,-2115.11 ; -1738.82,-1852.27 -1656.51,-1852.27 ; -1738.82,-1560.21 -1595.45,-1560.21 ; -1738.82,-1464.63 -1725.54,-1464.63 ; -1738.82,-1337.19 -1701.65,-1337.19 ; -1738.82,-1217.72 -1560.93,-1217.72 ; -1736.16,-2117.77 -1717.58,-2117.77 ; -1736.16,-1557.56 -1595.45,-1557.56 ; -1733.51,-2234.59 -1701.65,-2234.59 ; -1733.51,-2205.39 -1725.54,-2205.39 ; -1733.51,-2120.42 -1717.58,-2120.42 ; -1733.51,-1854.92 -1653.86,-1854.92 ; -1733.51,-1554.9 -1595.45,-1554.9 ; -1733.51,-1480.56 -1701.65,-1480.56 ; -1733.51,-1220.37 -1560.93,-1220.37 ; -1730.85,-2208.04 -1725.54,-2208.04 ; -1730.85,-2123.08 -1717.58,-2123.08 ; -1730.85,-1857.58 -1651.2,-1857.58 ; -1730.85,-1223.03 -1552.96,-1223.03 ; -1728.2,-2231.94 -1704.3,-2231.94 ; -1728.2,-2213.35 -1725.54,-2213.35 ; -1728.2,-2210.7 -1725.54,-2210.7 ; -1728.2,-1860.23 -1648.55,-1860.23 ; -1728.2,-1552.25 -1595.45,-1552.25 ; -1728.2,-1334.54 -1696.34,-1334.54 ; -1728.2,-1225.68 -1547.65,-1225.68 ; -1725.54,-2125.73 -1720.23,-2125.73 ; -1725.54,-1942.54 -1106.92,-1942.54 ; -1725.54,-1862.89 -1645.89,-1862.89 ; -1725.54,-1549.59 -1595.45,-1549.59 ; -1725.54,-1228.34 -1545,-1228.34 ; -1722.89,-1546.94 -1595.45,-1546.94 ; -1722.89,-1477.91 -1696.34,-1477.91 ; -1722.89,-1350.47 -1706.96,-1350.47 ; -1722.89,-1331.88 -1693.68,-1331.88 ; -1722.89,-1230.99 -1545,-1230.99 ; -1720.23,-1865.54 -1645.89,-1865.54 ; -1720.23,-1544.28 -1595.45,-1544.28 ; -1720.23,-1353.12 -1706.96,-1353.12 ; -1720.23,-1244.27 -1552.96,-1244.27 ; -1720.23,-1236.3 -1547.65,-1236.3 ; -1720.23,-1233.65 -1545,-1233.65 ; -1717.58,-1945.19 -1106.92,-1945.19 ; -1717.58,-1868.2 -1643.24,-1868.2 ; -1717.58,-1541.63 -1598.1,-1541.63 ; -1717.58,-1475.25 -1691.03,-1475.25 ; -1717.58,-1241.61 -1550.31,-1241.61 ; -1717.58,-1238.96 -1547.65,-1238.96 ; -1714.92,-1870.85 -1640.58,-1870.85 ; -1714.92,-1538.97 -1598.1,-1538.97 ; -1714.92,-1472.6 -1685.72,-1472.6 ; -1714.92,-1430.12 -1624.65,-1430.12 ; -1714.92,-1355.78 -1706.96,-1355.78 ; -1714.92,-1329.23 -1688.37,-1329.23 ; -1712.27,-1947.85 -1106.92,-1947.85 ; -1712.27,-1536.32 -1598.1,-1536.32 ; -1712.27,-1469.94 -1677.75,-1469.94 ; -1712.27,-1432.77 -1505.17,-1432.77 ; -1712.27,-1361.09 -1706.96,-1361.09 ; -1712.27,-1358.43 -1706.96,-1358.43 ; -1709.61,-2048.74 -1680.41,-2048.74 ; -1709.61,-1873.51 -1637.93,-1873.51 ; -1709.61,-1533.66 -1600.76,-1533.66 ; -1709.61,-1467.29 -1669.79,-1467.29 ; -1709.61,-1435.43 -1507.83,-1435.43 ; -1709.61,-1363.74 -1706.96,-1363.74 ; -1709.61,-1326.57 -1683.06,-1326.57 ; -1706.96,-2051.39 -1669.79,-2051.39 ; -1706.96,-2011.57 -1648.55,-2011.57 ; -1706.96,-1950.5 -1367.11,-1950.5 ; -1706.96,-1876.16 -1635.27,-1876.16 ; -1706.96,-1531.01 -1600.76,-1531.01 ; -1706.96,-1464.63 -1505.17,-1464.63 ; -1706.96,-1461.98 -1507.83,-1461.98 ; -1706.96,-1459.32 -1510.48,-1459.32 ; -1706.96,-1446.05 -1513.14,-1446.05 ; -1706.96,-1443.39 -1513.14,-1443.39 ; -1706.96,-1440.74 -1513.14,-1440.74 ; -1706.96,-1438.08 -1510.48,-1438.08 ; -1704.3,-1878.82 -1635.27,-1878.82 ; -1704.3,-1528.35 -1603.41,-1528.35 ; -1704.3,-1456.67 -1513.14,-1456.67 ; -1704.3,-1454.01 -1513.14,-1454.01 ; -1704.3,-1451.36 -1513.14,-1451.36 ; -1704.3,-1448.7 -1513.14,-1448.7 ; -1704.3,-1323.92 -1677.75,-1323.92 ; -1701.65,-2054.05 -1661.82,-2054.05 ; -1701.65,-2008.91 -1648.55,-2008.91 ; -1701.65,-1953.16 -1372.42,-1953.16 ; -1701.65,-1525.7 -1603.41,-1525.7 ; -1701.65,-1321.26 -1672.44,-1321.26 ; -1698.99,-2216.01 -1685.72,-2216.01 ; -1698.99,-2213.35 -1685.72,-2213.35 ; -1698.99,-2210.7 -1685.72,-2210.7 ; -1698.99,-2208.04 -1685.72,-2208.04 ; -1698.99,-2205.39 -1685.72,-2205.39 ; -1698.99,-2202.73 -1685.72,-2202.73 ; -1698.99,-2200.08 -1683.06,-2200.08 ; -1698.99,-2056.7 -1651.2,-2056.7 ; -1698.99,-1955.81 -1377.73,-1955.81 ; -1698.99,-1881.47 -1632.62,-1881.47 ; -1698.99,-1769.96 -1680.41,-1769.96 ; -1698.99,-1523.04 -1606.07,-1523.04 ; -1696.34,-2226.63 -1683.06,-2226.63 ; -1696.34,-2223.97 -1683.06,-2223.97 ; -1696.34,-2221.32 -1683.06,-2221.32 ; -1696.34,-2218.66 -1683.06,-2218.66 ; -1696.34,-2197.42 -1683.06,-2197.42 ; -1696.34,-2194.77 -1683.06,-2194.77 ; -1696.34,-2192.11 -1683.06,-2192.11 ; -1696.34,-2189.46 -1680.41,-2189.46 ; -1696.34,-2059.36 -1643.24,-2059.36 ; -1696.34,-2006.26 -1648.55,-2006.26 ; -1696.34,-1884.13 -1629.96,-1884.13 ; -1696.34,-1520.39 -1608.72,-1520.39 ; -1696.34,-1318.61 -1667.13,-1318.61 ; -1693.68,-2234.59 -1677.75,-2234.59 ; -1693.68,-2231.94 -1680.41,-2231.94 ; -1693.68,-2229.28 -1680.41,-2229.28 ; -1693.68,-2186.8 -1680.41,-2186.8 ; -1693.68,-2184.15 -1677.75,-2184.15 ; -1693.68,-2181.49 -1677.75,-2181.49 ; -1693.68,-2062.01 -1635.27,-2062.01 ; -1693.68,-2003.6 -1648.55,-2003.6 ; -1693.68,-1958.47 -1584.82,-1958.47 ; -1693.68,-1772.62 -1683.06,-1772.62 ; -1693.68,-1517.73 -1611.38,-1517.73 ; -1691.03,-2239.9 -1675.1,-2239.9 ; -1691.03,-2237.25 -1675.1,-2237.25 ; -1691.03,-2178.84 -1675.1,-2178.84 ; -1691.03,-2067.32 -1619.34,-2067.32 ; -1691.03,-2064.67 -1627.31,-2064.67 ; -1691.03,-2000.95 -1648.55,-2000.95 ; -1691.03,-1998.29 -1645.89,-1998.29 ; -1691.03,-1963.78 -1608.72,-1963.78 ; -1691.03,-1961.12 -1600.76,-1961.12 ; -1691.03,-1886.78 -1627.31,-1886.78 ; -1691.03,-1775.27 -1683.06,-1775.27 ; -1691.03,-1315.95 -1661.82,-1315.95 ; -1688.37,-2242.56 -1672.44,-2242.56 ; -1688.37,-2176.18 -1675.1,-2176.18 ; -1688.37,-2173.53 -1672.44,-2173.53 ; -1688.37,-2069.98 -1611.38,-2069.98 ; -1688.37,-1995.64 -1645.89,-1995.64 ; -1688.37,-1966.43 -1616.69,-1966.43 ; -1688.37,-1889.44 -1627.31,-1889.44 ; -1688.37,-1777.93 -1683.06,-1777.93 ; -1688.37,-1515.08 -1614.03,-1515.08 ; -1685.72,-2277.07 -1680.41,-2277.07 ; -1685.72,-2274.42 -1677.75,-2274.42 ; -1685.72,-2247.87 -1667.13,-2247.87 ; -1685.72,-2245.21 -1669.79,-2245.21 ; -1685.72,-2170.87 -1669.79,-2170.87 ; -1685.72,-2168.22 -1667.13,-2168.22 ; -1685.72,-2075.29 -1523.76,-2075.29 ; -1685.72,-2072.63 -1595.45,-2072.63 ; -1685.72,-1992.98 -1645.89,-1992.98 ; -1685.72,-1990.33 -1643.24,-1990.33 ; -1685.72,-1987.67 -1643.24,-1987.67 ; -1685.72,-1985.02 -1640.58,-1985.02 ; -1685.72,-1982.36 -1640.58,-1982.36 ; -1685.72,-1979.71 -1637.93,-1979.71 ; -1685.72,-1977.05 -1635.27,-1977.05 ; -1685.72,-1974.4 -1632.62,-1974.4 ; -1685.72,-1971.74 -1627.31,-1971.74 ; -1685.72,-1969.09 -1622,-1969.09 ; -1685.72,-1565.52 -1595.45,-1565.52 ; -1685.72,-1512.42 -1616.69,-1512.42 ; -1685.72,-1313.3 -1656.51,-1313.3 ; -1683.06,-2287.69 -1247.64,-2287.69 ; -1683.06,-2271.76 -1675.1,-2271.76 ; -1683.06,-2269.11 -1672.44,-2269.11 ; -1683.06,-2266.45 -1669.79,-2266.45 ; -1683.06,-2263.8 -1608.72,-2263.8 ; -1683.06,-2261.14 -1637.93,-2261.14 ; -1683.06,-2258.49 -1648.55,-2258.49 ; -1683.06,-2250.52 -1664.48,-2250.52 ; -1683.06,-2165.56 -1664.48,-2165.56 ; -1683.06,-2080.6 -1529.07,-2080.6 ; -1683.06,-2077.94 -1526.41,-2077.94 ; -1683.06,-2022.19 -1645.89,-2022.19 ; -1683.06,-1892.09 -1624.65,-1892.09 ; -1683.06,-1509.77 -1619.34,-1509.77 ; -1680.41,-2253.18 -1659.17,-2253.18 ; -1680.41,-2162.91 -1661.82,-2162.91 ; -1680.41,-2088.56 -1534.38,-2088.56 ; -1680.41,-2085.91 -1531.72,-2085.91 ; -1680.41,-2083.25 -1531.72,-2083.25 ; -1680.41,-1894.75 -1622,-1894.75 ; -1680.41,-1310.64 -1648.55,-1310.64 ; -1677.75,-2255.83 -1653.86,-2255.83 ; -1677.75,-2160.25 -1656.51,-2160.25 ; -1677.75,-2125.73 -1587.48,-2125.73 ; -1677.75,-2099.18 -1537.03,-2099.18 ; -1677.75,-2096.53 -1537.03,-2096.53 ; -1677.75,-2093.87 -1534.38,-2093.87 ; -1677.75,-2091.22 -1534.38,-2091.22 ; -1677.75,-1568.18 -1595.45,-1568.18 ; -1677.75,-1507.11 -1622,-1507.11 ; -1677.75,-1297.37 -1659.17,-1297.37 ; -1677.75,-1294.71 -1661.82,-1294.71 ; -1677.75,-1292.06 -1664.48,-1292.06 ; -1677.75,-1289.4 -1664.48,-1289.4 ; -1677.75,-1286.75 -1667.13,-1286.75 ; -1677.75,-1284.09 -1669.79,-1284.09 ; -1677.75,-1281.44 -1669.79,-1281.44 ; -1677.75,-1278.78 -1669.79,-1278.78 ; -1675.1,-2285.04 -1252.95,-2285.04 ; -1675.1,-2157.6 -1651.2,-2157.6 ; -1675.1,-2123.08 -1587.48,-2123.08 ; -1675.1,-2120.42 -1590.14,-2120.42 ; -1675.1,-2117.77 -1592.79,-2117.77 ; -1675.1,-2115.11 -1595.45,-2115.11 ; -1675.1,-2112.46 -1598.1,-2112.46 ; -1675.1,-2109.8 -1603.41,-2109.8 ; -1675.1,-2107.15 -1606.07,-2107.15 ; -1675.1,-2104.49 -1537.03,-2104.49 ; -1675.1,-2101.84 -1537.03,-2101.84 ; -1675.1,-1897.4 -1622,-1897.4 ; -1675.1,-1307.99 -1637.93,-1307.99 ; -1675.1,-1305.33 -1584.82,-1305.33 ; -1675.1,-1302.68 -1590.14,-1302.68 ; -1675.1,-1300.02 -1595.45,-1300.02 ; -1675.1,-1276.13 -1669.79,-1276.13 ; -1672.44,-2282.38 -1255.6,-2282.38 ; -1672.44,-2154.94 -1645.89,-2154.94 ; -1672.44,-1900.06 -1619.34,-1900.06 ; -1672.44,-1783.24 -1635.27,-1783.24 ; -1672.44,-1780.58 -1640.58,-1780.58 ; -1672.44,-1777.93 -1643.24,-1777.93 ; -1672.44,-1775.27 -1648.55,-1775.27 ; -1672.44,-1570.83 -1595.45,-1570.83 ; -1672.44,-1504.46 -1627.31,-1504.46 ; -1672.44,-1273.47 -1669.79,-1273.47 ; -1672.44,-1270.82 -1669.79,-1270.82 ; -1669.79,-2279.73 -1648.55,-2279.73 ; -1669.79,-2231.94 -1531.72,-2231.94 ; -1669.79,-2024.84 -1643.24,-2024.84 ; -1669.79,-1788.55 -1627.31,-1788.55 ; -1669.79,-1785.89 -1632.62,-1785.89 ; -1669.79,-1772.62 -1653.86,-1772.62 ; -1669.79,-1573.49 -1595.45,-1573.49 ; -1667.13,-2277.07 -1659.17,-2277.07 ; -1667.13,-2234.59 -1433.49,-2234.59 ; -1667.13,-2152.28 -1622,-2152.28 ; -1667.13,-1902.71 -1619.34,-1902.71 ; -1667.13,-1793.86 -1622,-1793.86 ; -1667.13,-1791.2 -1624.65,-1791.2 ; -1667.13,-1576.14 -1595.45,-1576.14 ; -1667.13,-1501.8 -1635.27,-1501.8 ; -1664.48,-2237.25 -1428.18,-2237.25 ; -1664.48,-2149.63 -1574.2,-2149.63 ; -1664.48,-1799.17 -1614.03,-1799.17 ; -1664.48,-1796.51 -1619.34,-1796.51 ; -1664.48,-1769.96 -1661.82,-1769.96 ; -1664.48,-1578.8 -1595.45,-1578.8 ; -1661.82,-2266.45 -1614.03,-2266.45 ; -1661.82,-2239.9 -1425.52,-2239.9 ; -1661.82,-2146.97 -1576.86,-2146.97 ; -1661.82,-2027.5 -1643.24,-2027.5 ; -1661.82,-1801.82 -1611.38,-1801.82 ; -1661.82,-1581.45 -1598.1,-1581.45 ; -1661.82,-1278.78 -1627.31,-1278.78 ; -1661.82,-1276.13 -1622,-1276.13 ; -1661.82,-1273.47 -1616.69,-1273.47 ; -1659.17,-2242.56 -1422.87,-2242.56 ; -1659.17,-1905.37 -1616.69,-1905.37 ; -1659.17,-1804.48 -1608.72,-1804.48 ; -1659.17,-1584.11 -1598.1,-1584.11 ; -1659.17,-1395.6 -1643.24,-1395.6 ; -1659.17,-1392.95 -1645.89,-1392.95 ; -1659.17,-1390.29 -1645.89,-1390.29 ; -1659.17,-1387.64 -1648.55,-1387.64 ; -1659.17,-1384.98 -1648.55,-1384.98 ; -1659.17,-1382.33 -1648.55,-1382.33 ; -1659.17,-1379.67 -1648.55,-1379.67 ; -1659.17,-1377.02 -1645.89,-1377.02 ; -1659.17,-1281.44 -1635.27,-1281.44 ; -1659.17,-1270.82 -1608.72,-1270.82 ; -1656.51,-2245.21 -1598.1,-2245.21 ; -1656.51,-1807.13 -1606.07,-1807.13 ; -1656.51,-1639.86 -1653.86,-1639.86 ; -1656.51,-1637.21 -1645.89,-1637.21 ; -1656.51,-1589.42 -1600.76,-1589.42 ; -1656.51,-1586.76 -1598.1,-1586.76 ; -1656.51,-1400.91 -1640.58,-1400.91 ; -1656.51,-1398.26 -1643.24,-1398.26 ; -1656.51,-1374.36 -1645.89,-1374.36 ; -1656.51,-1371.71 -1643.24,-1371.71 ; -1656.51,-1284.09 -1643.24,-1284.09 ; -1653.86,-2269.11 -1619.34,-2269.11 ; -1653.86,-2144.32 -1576.86,-2144.32 ; -1653.86,-2030.15 -1640.58,-2030.15 ; -1653.86,-1908.02 -1616.69,-1908.02 ; -1653.86,-1812.44 -1600.76,-1812.44 ; -1653.86,-1809.79 -1603.41,-1809.79 ; -1653.86,-1661.11 -1515.79,-1661.11 ; -1653.86,-1634.55 -1640.58,-1634.55 ; -1653.86,-1631.9 -1635.27,-1631.9 ; -1653.86,-1594.73 -1600.76,-1594.73 ; -1653.86,-1592.07 -1600.76,-1592.07 ; -1653.86,-1499.15 -1648.55,-1499.15 ; -1653.86,-1403.57 -1635.27,-1403.57 ; -1653.86,-1369.05 -1640.58,-1369.05 ; -1653.86,-1366.4 -1637.93,-1366.4 ; -1653.86,-1268.16 -1600.76,-1268.16 ; -1651.2,-2247.87 -1606.07,-2247.87 ; -1651.2,-1815.1 -1598.1,-1815.1 ; -1651.2,-1629.24 -1632.62,-1629.24 ; -1651.2,-1626.59 -1627.31,-1626.59 ; -1651.2,-1623.93 -1624.65,-1623.93 ; -1651.2,-1621.28 -1622,-1621.28 ; -1651.2,-1618.62 -1619.34,-1618.62 ; -1651.2,-1608 -1608.72,-1608 ; -1651.2,-1605.35 -1608.72,-1605.35 ; -1651.2,-1602.69 -1606.07,-1602.69 ; -1651.2,-1600.04 -1603.41,-1600.04 ; -1651.2,-1597.38 -1603.41,-1597.38 ; -1651.2,-1406.22 -1629.96,-1406.22 ; -1651.2,-1363.74 -1635.27,-1363.74 ; -1651.2,-1297.37 -1598.1,-1297.37 ; -1651.2,-1260.2 -1579.51,-1260.2 ; -1651.2,-1257.54 -1574.2,-1257.54 ; -1648.55,-2141.66 -1576.86,-2141.66 ; -1648.55,-1817.75 -1595.45,-1817.75 ; -1648.55,-1615.97 -1616.69,-1615.97 ; -1648.55,-1613.31 -1614.03,-1613.31 ; -1648.55,-1610.66 -1611.38,-1610.66 ; -1648.55,-1408.88 -1579.51,-1408.88 ; -1648.55,-1265.51 -1595.45,-1265.51 ; -1648.55,-1262.85 -1587.48,-1262.85 ; -1645.89,-2032.81 -1640.58,-2032.81 ; -1645.89,-1910.68 -1619.34,-1910.68 ; -1645.89,-1820.41 -1592.79,-1820.41 ; -1645.89,-1411.53 -1582.17,-1411.53 ; -1645.89,-1361.09 -1614.03,-1361.09 ; -1643.24,-2250.52 -1614.03,-2250.52 ; -1643.24,-1823.06 -1590.14,-1823.06 ; -1643.24,-1658.45 -1518.45,-1658.45 ; -1643.24,-1414.19 -1587.48,-1414.19 ; -1643.24,-1358.43 -1619.34,-1358.43 ; -1640.58,-2035.46 -1637.93,-2035.46 ; -1640.58,-1825.72 -1584.82,-1825.72 ; -1640.58,-1759.34 -1475.97,-1759.34 ; -1640.58,-1294.71 -1603.41,-1294.71 ; -1637.93,-2154.94 -1622,-2154.94 ; -1637.93,-2139.01 -1606.07,-2139.01 ; -1637.93,-1828.37 -1582.17,-1828.37 ; -1637.93,-1416.84 -1592.79,-1416.84 ; -1637.93,-1390.29 -1592.79,-1390.29 ; -1637.93,-1387.64 -1590.14,-1387.64 ; -1635.27,-2160.25 -1622,-2160.25 ; -1635.27,-2157.6 -1622,-2157.6 ; -1635.27,-1913.33 -1624.65,-1913.33 ; -1635.27,-1831.03 -1579.51,-1831.03 ; -1635.27,-1655.8 -1518.45,-1655.8 ; -1635.27,-1467.29 -1502.52,-1467.29 ; -1635.27,-1392.95 -1595.45,-1392.95 ; -1635.27,-1355.78 -1627.31,-1355.78 ; -1635.27,-1292.06 -1603.41,-1292.06 ; -1632.62,-2165.56 -1622,-2165.56 ; -1632.62,-2162.91 -1622,-2162.91 ; -1632.62,-1833.68 -1576.86,-1833.68 ; -1632.62,-1762 -1475.97,-1762 ; -1632.62,-1419.5 -1600.76,-1419.5 ; -1632.62,-1395.6 -1600.76,-1395.6 ; -1629.96,-2178.84 -1627.31,-2178.84 ; -1629.96,-2176.18 -1624.65,-2176.18 ; -1629.96,-2173.53 -1624.65,-2173.53 ; -1629.96,-2170.87 -1622,-2170.87 ; -1629.96,-2168.22 -1622,-2168.22 ; -1629.96,-1836.34 -1574.2,-1836.34 ; -1629.96,-1289.4 -1595.45,-1289.4 ; -1627.31,-2279.73 -1260.91,-2279.73 ; -1627.31,-1838.99 -1571.55,-1838.99 ; -1627.31,-1653.14 -1518.45,-1653.14 ; -1624.65,-1841.65 -1568.89,-1841.65 ; -1624.65,-1764.65 -1475.97,-1764.65 ; -1624.65,-1469.94 -1499.86,-1469.94 ; -1624.65,-1398.26 -1608.72,-1398.26 ; -1624.65,-1286.75 -1587.48,-1286.75 ; -1622,-1844.3 -1566.24,-1844.3 ; -1622,-1650.49 -1521.1,-1650.49 ; -1619.34,-2261.14 -1606.07,-2261.14 ; -1619.34,-1846.96 -1563.58,-1846.96 ; -1619.34,-1767.31 -1475.97,-1767.31 ; -1619.34,-1647.83 -1521.1,-1647.83 ; -1619.34,-1472.6 -1494.55,-1472.6 ; -1619.34,-1284.09 -1579.51,-1284.09 ; -1616.69,-2277.07 -1422.87,-2277.07 ; -1616.69,-1849.61 -1563.58,-1849.61 ; -1614.03,-1852.27 -1560.93,-1852.27 ; -1614.03,-1769.96 -1475.97,-1769.96 ; -1614.03,-1645.18 -1521.1,-1645.18 ; -1614.03,-1475.25 -1436.14,-1475.25 ; -1611.38,-2274.42 -1428.18,-2274.42 ; -1611.38,-1868.2 -1608.72,-1868.2 ; -1611.38,-1854.92 -1558.27,-1854.92 ; -1611.38,-1307.99 -1582.17,-1307.99 ; -1611.38,-1281.44 -1571.55,-1281.44 ; -1608.72,-2258.49 -1603.41,-2258.49 ; -1608.72,-1923.95 -1398.97,-1923.95 ; -1608.72,-1873.51 -1603.41,-1873.51 ; -1608.72,-1870.85 -1606.07,-1870.85 ; -1608.72,-1772.62 -1475.97,-1772.62 ; -1608.72,-1642.52 -1521.1,-1642.52 ; -1608.72,-1477.91 -1436.14,-1477.91 ; -1606.07,-2271.76 -1428.18,-2271.76 ; -1606.07,-2152.28 -1568.89,-2152.28 ; -1606.07,-1878.82 -1598.1,-1878.82 ; -1606.07,-1876.16 -1600.76,-1876.16 ; -1606.07,-1857.58 -1555.62,-1857.58 ; -1606.07,-1639.86 -1523.76,-1639.86 ; -1606.07,-1430.12 -1475.97,-1430.12 ; -1603.41,-1921.3 -1412.25,-1921.3 ; -1603.41,-1884.13 -1590.14,-1884.13 ; -1603.41,-1881.47 -1592.79,-1881.47 ; -1603.41,-1860.23 -1552.96,-1860.23 ; -1603.41,-1775.27 -1475.97,-1775.27 ; -1603.41,-1637.21 -1523.76,-1637.21 ; -1603.41,-1480.56 -1433.49,-1480.56 ; -1603.41,-1406.22 -1576.86,-1406.22 ; -1603.41,-1310.64 -1579.51,-1310.64 ; -1603.41,-1278.78 -1566.24,-1278.78 ; -1600.76,-2269.11 -1428.18,-2269.11 ; -1600.76,-1918.64 -1420.21,-1918.64 ; -1600.76,-1889.44 -1584.82,-1889.44 ; -1600.76,-1886.78 -1587.48,-1886.78 ; -1600.76,-1862.89 -1550.31,-1862.89 ; -1600.76,-1634.55 -1523.76,-1634.55 ; -1600.76,-1483.22 -1433.49,-1483.22 ; -1598.1,-2266.45 -1422.87,-2266.45 ; -1598.1,-1915.99 -1542.34,-1915.99 ; -1598.1,-1913.33 -1550.31,-1913.33 ; -1598.1,-1897.4 -1574.2,-1897.4 ; -1598.1,-1894.75 -1576.86,-1894.75 ; -1598.1,-1892.09 -1582.17,-1892.09 ; -1598.1,-1865.54 -1547.65,-1865.54 ; -1598.1,-1777.93 -1473.31,-1777.93 ; -1598.1,-1631.9 -1523.76,-1631.9 ; -1598.1,-1485.87 -1436.14,-1485.87 ; -1598.1,-1313.3 -1574.2,-1313.3 ; -1598.1,-1276.13 -1558.27,-1276.13 ; -1595.45,-2263.8 -1414.9,-2263.8 ; -1595.45,-2154.94 -1566.24,-2154.94 ; -1595.45,-2048.74 -1552.96,-2048.74 ; -1595.45,-1910.68 -1555.62,-1910.68 ; -1595.45,-1908.02 -1558.27,-1908.02 ; -1595.45,-1905.37 -1563.58,-1905.37 ; -1595.45,-1902.71 -1566.24,-1902.71 ; -1595.45,-1900.06 -1571.55,-1900.06 ; -1595.45,-1868.2 -1545,-1868.2 ; -1595.45,-1780.58 -1473.31,-1780.58 ; -1595.45,-1488.53 -1441.45,-1488.53 ; -1595.45,-1427.46 -1478.62,-1427.46 ; -1595.45,-1403.57 -1574.2,-1403.57 ; -1592.79,-2261.14 -1412.25,-2261.14 ; -1592.79,-2051.39 -1560.93,-2051.39 ; -1592.79,-1870.85 -1545,-1870.85 ; -1592.79,-1629.24 -1523.76,-1629.24 ; -1592.79,-1626.59 -1521.1,-1626.59 ; -1592.79,-1491.18 -1444.11,-1491.18 ; -1592.79,-1315.95 -1574.2,-1315.95 ; -1590.14,-2258.49 -1412.25,-2258.49 ; -1590.14,-2157.6 -1560.93,-2157.6 ; -1590.14,-2139.01 -1574.2,-2139.01 ; -1590.14,-1873.51 -1542.34,-1873.51 ; -1590.14,-1783.24 -1473.31,-1783.24 ; -1590.14,-1623.93 -1521.1,-1623.93 ; -1590.14,-1493.84 -1446.76,-1493.84 ; -1590.14,-1424.81 -1478.62,-1424.81 ; -1590.14,-1400.91 -1571.55,-1400.91 ; -1590.14,-1318.61 -1571.55,-1318.61 ; -1590.14,-1273.47 -1550.31,-1273.47 ; -1587.48,-2255.83 -1412.25,-2255.83 ; -1587.48,-2253.18 -1414.9,-2253.18 ; -1587.48,-2250.52 -1417.56,-2250.52 ; -1587.48,-2247.87 -1417.56,-2247.87 ; -1587.48,-2245.21 -1420.21,-2245.21 ; -1587.48,-2136.35 -1574.2,-2136.35 ; -1587.48,-2107.15 -1537.03,-2107.15 ; -1587.48,-2046.08 -1547.65,-2046.08 ; -1587.48,-1785.89 -1470.66,-1785.89 ; -1587.48,-1621.28 -1521.1,-1621.28 ; -1587.48,-1496.49 -1449.42,-1496.49 ; -1587.48,-1398.26 -1568.89,-1398.26 ; -1584.82,-1876.16 -1539.69,-1876.16 ; -1584.82,-1618.62 -1521.1,-1618.62 ; -1584.82,-1499.15 -1452.07,-1499.15 ; -1584.82,-1422.15 -1481.28,-1422.15 ; -1584.82,-1395.6 -1542.34,-1395.6 ; -1584.82,-1321.26 -1568.89,-1321.26 ; -1582.17,-2160.25 -1555.62,-2160.25 ; -1582.17,-2133.7 -1574.2,-2133.7 ; -1582.17,-2043.43 -1542.34,-2043.43 ; -1582.17,-1971.74 -1566.24,-1971.74 ; -1582.17,-1878.82 -1539.69,-1878.82 ; -1582.17,-1788.55 -1470.66,-1788.55 ; -1582.17,-1615.97 -1518.45,-1615.97 ; -1582.17,-1613.31 -1515.79,-1613.31 ; -1582.17,-1501.8 -1454.73,-1501.8 ; -1582.17,-1392.95 -1537.03,-1392.95 ; -1582.17,-1326.57 -1566.24,-1326.57 ; -1582.17,-1323.92 -1566.24,-1323.92 ; -1582.17,-1270.82 -1542.34,-1270.82 ; -1579.51,-2131.04 -1574.2,-2131.04 ; -1579.51,-2128.39 -1574.2,-2128.39 ; -1579.51,-2125.73 -1574.2,-2125.73 ; -1579.51,-2123.08 -1576.86,-2123.08 ; -1579.51,-2109.8 -1537.03,-2109.8 ; -1579.51,-2040.77 -1539.69,-2040.77 ; -1579.51,-1974.4 -1558.27,-1974.4 ; -1579.51,-1881.47 -1537.03,-1881.47 ; -1579.51,-1791.2 -1468,-1791.2 ; -1579.51,-1610.66 -1513.14,-1610.66 ; -1579.51,-1507.11 -1457.38,-1507.11 ; -1579.51,-1504.46 -1457.38,-1504.46 ; -1579.51,-1419.5 -1481.28,-1419.5 ; -1579.51,-1390.29 -1534.38,-1390.29 ; -1579.51,-1329.23 -1563.58,-1329.23 ; -1576.86,-2162.91 -1550.31,-2162.91 ; -1576.86,-2038.12 -1537.03,-2038.12 ; -1576.86,-1977.05 -1552.96,-1977.05 ; -1576.86,-1884.13 -1534.38,-1884.13 ; -1576.86,-1793.86 -1468,-1793.86 ; -1576.86,-1608 -1510.48,-1608 ; -1576.86,-1605.35 -1507.83,-1605.35 ; -1576.86,-1602.69 -1502.52,-1602.69 ; -1576.86,-1512.42 -1460.04,-1512.42 ; -1576.86,-1509.77 -1460.04,-1509.77 ; -1576.86,-1387.64 -1534.38,-1387.64 ; -1576.86,-1384.98 -1550.31,-1384.98 ; -1576.86,-1334.54 -1560.93,-1334.54 ; -1576.86,-1331.88 -1563.58,-1331.88 ; -1576.86,-1268.16 -1534.38,-1268.16 ; -1574.2,-2165.56 -1545,-2165.56 ; -1574.2,-2112.46 -1534.38,-2112.46 ; -1574.2,-2035.46 -1534.38,-2035.46 ; -1574.2,-1979.71 -1547.65,-1979.71 ; -1574.2,-1600.04 -1460.04,-1600.04 ; -1574.2,-1597.38 -1465.35,-1597.38 ; -1574.2,-1517.73 -1462.69,-1517.73 ; -1574.2,-1515.08 -1462.69,-1515.08 ; -1574.2,-1416.84 -1483.93,-1416.84 ; -1574.2,-1382.33 -1555.62,-1382.33 ; -1574.2,-1379.67 -1558.27,-1379.67 ; -1574.2,-1339.85 -1558.27,-1339.85 ; -1574.2,-1337.19 -1560.93,-1337.19 ; -1571.55,-2115.11 -1534.38,-2115.11 ; -1571.55,-2032.81 -1531.72,-2032.81 ; -1571.55,-1982.36 -1545,-1982.36 ; -1571.55,-1886.78 -1534.38,-1886.78 ; -1571.55,-1796.51 -1465.35,-1796.51 ; -1571.55,-1594.73 -1468,-1594.73 ; -1571.55,-1592.07 -1473.31,-1592.07 ; -1571.55,-1523.04 -1462.69,-1523.04 ; -1571.55,-1520.39 -1462.69,-1520.39 ; -1571.55,-1414.19 -1483.93,-1414.19 ; -1571.55,-1377.02 -1558.27,-1377.02 ; -1571.55,-1374.36 -1558.27,-1374.36 ; -1571.55,-1371.71 -1558.27,-1371.71 ; -1571.55,-1347.81 -1558.27,-1347.81 ; -1571.55,-1345.16 -1558.27,-1345.16 ; -1571.55,-1342.5 -1558.27,-1342.5 ; -1568.89,-2168.22 -1539.69,-2168.22 ; -1568.89,-2117.77 -1534.38,-2117.77 ; -1568.89,-2030.15 -1531.72,-2030.15 ; -1568.89,-2027.5 -1529.07,-2027.5 ; -1568.89,-1987.67 -1539.69,-1987.67 ; -1568.89,-1985.02 -1542.34,-1985.02 ; -1568.89,-1958.47 -1380.39,-1958.47 ; -1568.89,-1889.44 -1531.72,-1889.44 ; -1568.89,-1799.17 -1465.35,-1799.17 ; -1568.89,-1589.42 -1478.62,-1589.42 ; -1568.89,-1586.76 -1483.93,-1586.76 ; -1568.89,-1584.11 -1494.55,-1584.11 ; -1568.89,-1581.45 -1505.17,-1581.45 ; -1568.89,-1533.66 -1465.35,-1533.66 ; -1568.89,-1531.01 -1465.35,-1531.01 ; -1568.89,-1528.35 -1462.69,-1528.35 ; -1568.89,-1525.7 -1462.69,-1525.7 ; -1568.89,-1411.53 -1486.59,-1411.53 ; -1568.89,-1369.05 -1555.62,-1369.05 ; -1568.89,-1366.4 -1555.62,-1366.4 ; -1568.89,-1363.74 -1555.62,-1363.74 ; -1568.89,-1361.09 -1555.62,-1361.09 ; -1568.89,-1358.43 -1555.62,-1358.43 ; -1568.89,-1355.78 -1555.62,-1355.78 ; -1568.89,-1353.12 -1555.62,-1353.12 ; -1568.89,-1350.47 -1555.62,-1350.47 ; -1568.89,-1265.51 -1526.41,-1265.51 ; -1566.24,-2125.73 -1529.07,-2125.73 ; -1566.24,-2123.08 -1531.72,-2123.08 ; -1566.24,-2120.42 -1531.72,-2120.42 ; -1566.24,-2072.63 -1521.1,-2072.63 ; -1566.24,-2024.84 -1529.07,-2024.84 ; -1566.24,-2022.19 -1529.07,-2022.19 ; -1566.24,-1992.98 -1534.38,-1992.98 ; -1566.24,-1990.33 -1537.03,-1990.33 ; -1566.24,-1892.09 -1531.72,-1892.09 ; -1566.24,-1801.82 -1462.69,-1801.82 ; -1566.24,-1578.8 -1521.1,-1578.8 ; -1566.24,-1576.14 -1550.31,-1576.14 ; -1566.24,-1552.25 -1460.04,-1552.25 ; -1566.24,-1549.59 -1460.04,-1549.59 ; -1566.24,-1546.94 -1462.69,-1546.94 ; -1566.24,-1544.28 -1462.69,-1544.28